# EAGLE board DCDC_24Vto12V (EAGLE 9.6.2)
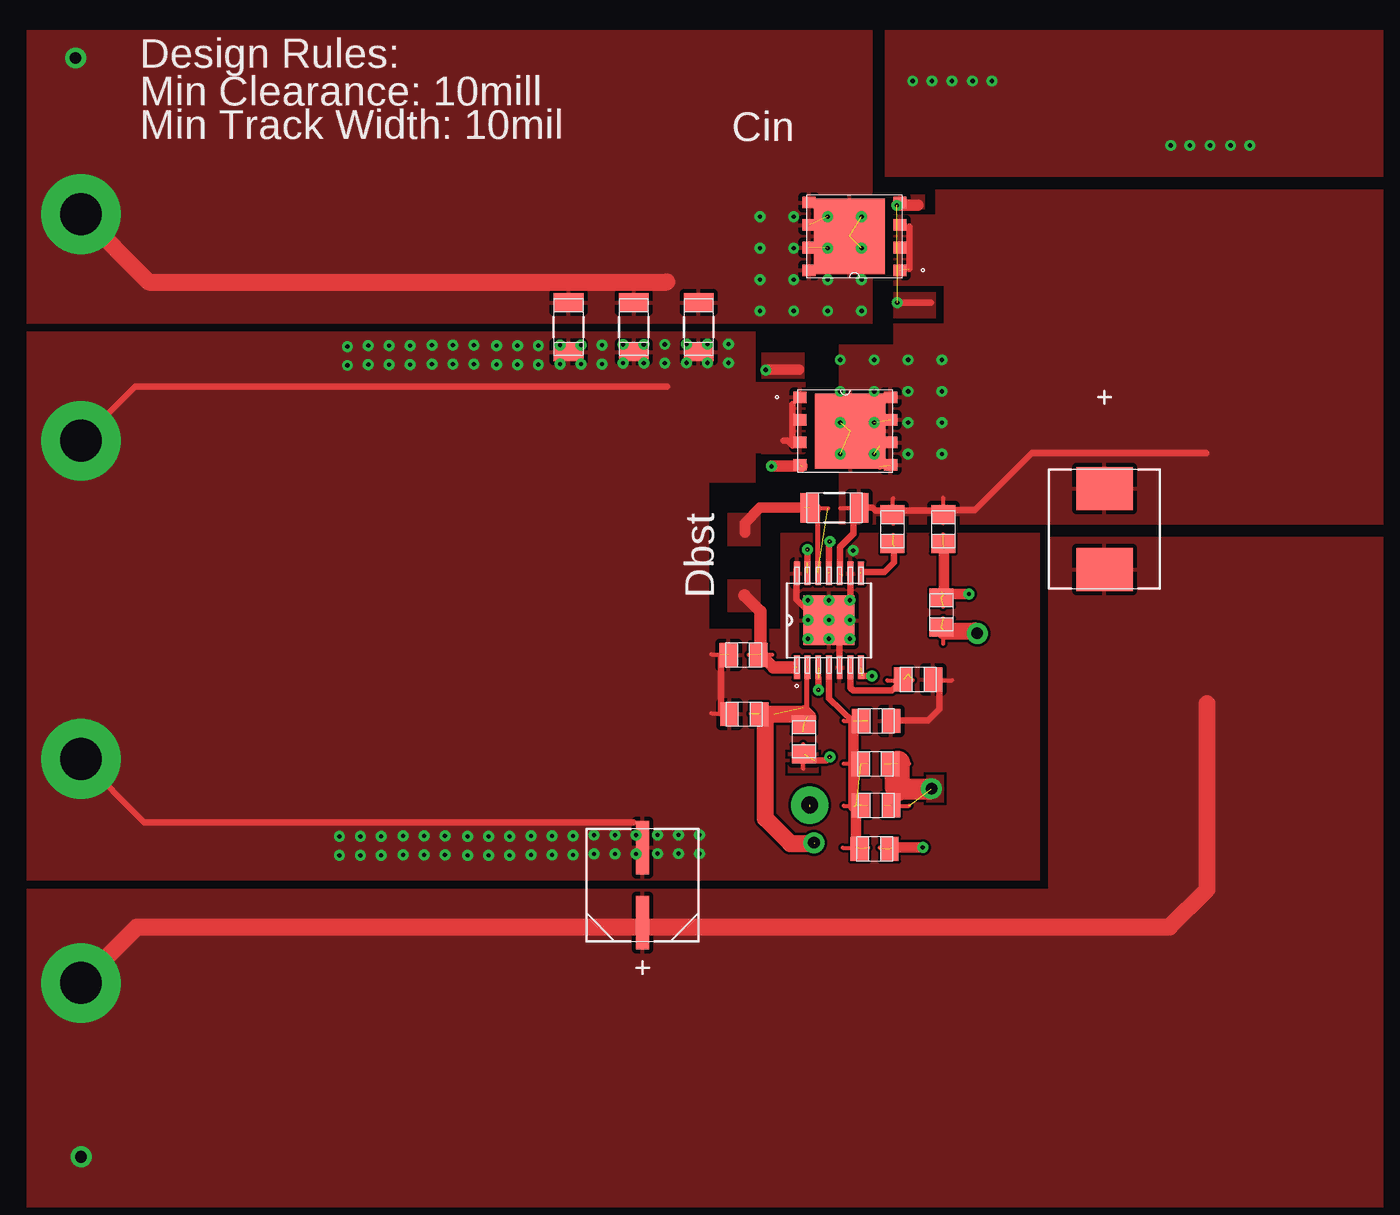
[diagram p0: board, top side]
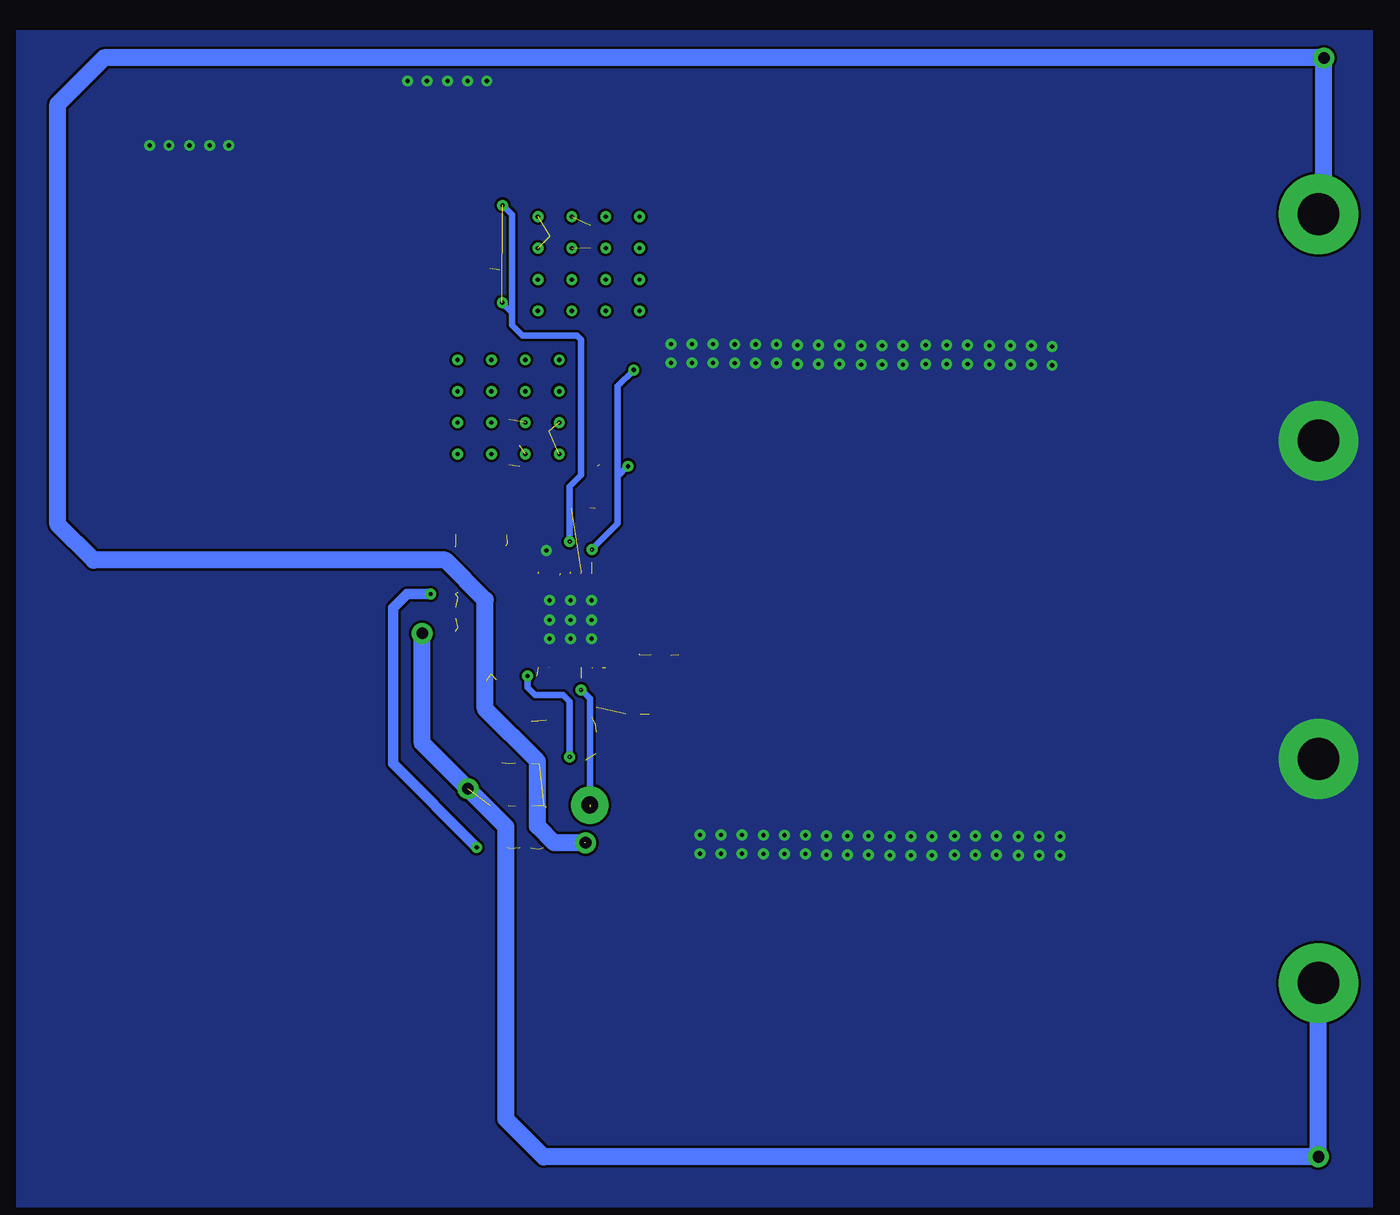
[diagram p1: board, bottom side, seen from below]

No outline drawn. Coordinates in mm, seen from the top.
Copper layers ((1*2)+(15*16)): TOP 0.035mm / dielectric 0.15mm / INTERNAL1 0.035mm / dielectric 0.15mm / layer 15 0.035mm / dielectric 0.2mm / BOTTOM 0.035mm
Design rules "custom": minimum track width 6mil, minimum drill 0.35mm, track to track 6mil, track to pad 6mil, pad to pad 6mil, via to via 6mil, smd to smd 6mil, copper to edge 40mil, drill to drill 6mil, minimum pad ring 10mil, minimum via ring 8mil, stop-mask expansion 4mil, vias tented up to drill 0mil, thermal gap 10mil

## Footprints (pad centres in the part's own frame; a part is rotated, then mirrored left to right if it is on the bottom)
0805 = smd 1.118 x 1.448: 1 -0.902,0; 2 0.902,0
1206 = smd 1.118 x 1.803: 1 -1.499,0; 2 1.499,0
SM_RADIAL_6.3AMM = smd 3.251 x 0.787: 1 -2.273,0; 2 2.273,0
TP-1502 = drill 0.813 pad 1.651: 1 0,0
IHLP-2525CZ = smd 2.616 x 3.429: 1 -2.464,0; 2 2.464,0
TRANS_NEXFET_Q5A = smd 0.8 x 0.7: 1 -2.752,2.055; 2 -2.752,0.685; 3 -2.752,-0.685; 4 -2.752,-2.055; 5 2.752,-2.055; 6 2.752,-0.685; 7 2.752,0.685; 8 2.752,2.055 | smd 4.3 x 4.56: 9 0.3,0
MXA14A = smd 1.422 x 0.356: 1 -2.845,1.95; 2 -2.845,1.3; 3 -2.845,0.65; 4 -2.845,0; 5 -2.845,-0.65; 6 -2.845,-1.3; 7 -2.845,-1.95; 8 2.845,-1.95; 9 2.845,-1.3; 10 2.845,-0.65; 11 2.845,0; 12 2.845,0.65; 13 2.845,1.3; 14 2.845,1.95 | smd 2.997 x 3.099: 15 0,0

## Placement (x,y rotation side)
CAC  [0805]  77.06,47.24 0 top
CBST  [1206]  74.63,67.94 0 top
CBYP  [0805]  69.16,55.42 180 top
CFF  [0805]  77.17,49.89 180 top
CIN_1  [1206]  66.4,78.89 270 top
CIN_2  [1206]  62.46,78.89 270 top
CIN_3  [1206]  58.5,78.89 270 top
COUT  [SM_RADIAL_6.3AMM]  62.99,45.06 90 top
CR  [0805]  81.13,61.59 270 top
CSS  [0805]  79.71,57.53 0 top
CVCC  [0805]  69.11,59 180 top
EN  [TP-1502]  73.1,49.89 0 top
GND  [TP-1502]  28.91,71.98 0 top
GND1  [TP-1502]  28.91,52.65 90 top
L1  [IHLP-2525CZ]  91.01,66.65 270 top
M1  [TRANS_NEXFET_Q5A]  75.84,84.4 180 top
M2  [TRANS_NEXFET_Q5A]  75.29,72.59 0 top
RFB1  [0805]  77.17,55.02 0 top
RFB2  [0805]  77.11,52.4 180 top
RLIM  [0805]  78.16,66.65 270 top
RON  [0805]  72.77,53.9 270 top
RR  [0805]  81.23,66.65 90 top
U1  [MXA14A]  74.3,61.11 90 top
VIN  [TP-1502]  28.91,85.72 0 top
VOUT  [TP-1502]  28.91,39.07 0 top

## Library data of the parts
CAC = ultra-librarian; REFDES: Cac; TYPE: C0805C223K5RACTU
CBST = ultra-librarian; REFDES: Cbst; TYPE: ECPU1C474MA5
CBYP = ultra-librarian; REFDES: Cbyp; TYPE: C0805C104M5RACTU
CFF = ultra-librarian; REFDES: Cff; TYPE: GRM2165C2A131JA01D
CIN_1-CIN_3 = ultra-librarian
COUT = ultra-librarian; REFDES: Cout; TYPE: EEHZC1E560P
CR = ultra-librarian; REFDES: Cr; TYPE: C0805C223K5RACTU
CSS = ultra-librarian; REFDES: Css; TYPE: C2012C0G1H153J085AA
CVCC = ultra-librarian; REFDES: Cvcc; TYPE: GRM21BR71A225KA01L
EN = ultra-librarian; REFDES: EN; TYPE: TP-1502
GND = ultra-librarian; REFDES: GND; TYPE: TP-1502
GND1 = ultra-librarian; REFDES: GND1; TYPE: TP-1502
L1 = ultra-librarian; REFDES: L1; TYPE: IHLP2525CZER8R2M01
M1 = ultra-librarian; REFDES: M1; TYPE: CSD18504Q5A
M2 = ultra-librarian; REFDES: M2; TYPE: CSD18537NQ5A
RFB1 = ultra-librarian; REFDES: Rfb1; TYPE: ERJ-6ENF1002V
RFB2 = ultra-librarian; REFDES: Rfb2; TYPE: ERJ-6ENF1913V
RLIM = ultra-librarian; REFDES: Rlim; TYPE: C0805C223K5RACTU
RON = ultra-librarian; REFDES: Ron; TYPE: CRCW0805205KFKEA
RR = ultra-librarian; REFDES: Rr; TYPE: C0805C223K5RACTU
U1 = ultra-librarian; REFDES: U1; TYPE: LM3150MH/NOPB
VIN = ultra-librarian; REFDES: VIN; TYPE: TP-1502
VOUT = ultra-librarian; REFDES: VOUT; TYPE: TP-1502

## Nets
0: CBYP.2 CIN_1.2 CIN_2.2 CIN_3.2 COUT.2 CSS.2 CVCC.2 GND1.1 GND.1 M2.1 M2.2 M2.3 RFB1.2 U1.5 U1.9 U1.14 U1.15
1: CBYP.1 CIN_1.1 CIN_2.1 CIN_3.1 M1.5 M1.6 M1.7 M1.8 M1.9 RON.1 U1.2 VIN.1
2: RON.2 U1.7
3: CAC.1 CFF.2 RFB1.1 RFB2.2 U1.4
4: CBST.2 L1.1 M1.1 M1.2 M1.3 M2.5 M2.6 M2.7 M2.8 M2.9 RLIM.1 RR.2 U1.10
5: CFF.1 COUT.1 CR.2 L1.2 RFB2.1 VOUT.1
7: M2.4 U1.13
8: CBST.1 U1.12
9: M1.4 U1.11
10: RLIM.2 U1.8
11: CSS.1 U1.6
12: CVCC.1 U1.1
19: EN.1 U1.3
26: CAC.2 CR.1 RR.1

## Tracks (layer width: path | path; a pad name or v marks a point on that pad's centre or on a via)
0  (via drill 0.25 pad 0.51, 2.54 pad 4.83)  (1 unrouted)
  TOP 0.254: 67.16,59.05 68.3,59.05 | 77.67,55.02 79.15,55.02 | 80.21,57.48 81.76,57.48 | 67.16,55.47 68.3,55.47
  TOP 0.381: 81,57.51 81,55.75 80.29,55.04 78.41,55.04 | v28.93,52.7 32.77,48.87 62.43,48.87 | v28.93,72.01 32.21,75.29 64.47,75.29 | 71.53,72.01 71.78,72.01 72.08,71.7 72.08,72.97 72.08,74.24 | 67.74,55.47 67.74,59.05 | 75.59,64.34 75.59,61.75 74.93,61.11 74.93,59.74 | 74.93,58.27 74.93,59.74 | 74.93,59.74 72.31,62.38 72.31,64.21
  other vias: 95.02,89.92 96.19,89.92 97.41,89.92 99.82,89.92 98.65,89.92 83.01,93.83 84.18,93.83 81.76,93.83 80.54,93.83 79.38,93.83 66.45,46.96 65.18,46.96 63.91,46.96 60.05,46.94 61.32,46.94 62.59,46.94 62.59,48.08 61.32,48.08 60.05,48.08 63.91,48.11 65.18,48.11 66.45,48.11 58.78,46.89 57.51,46.89 56.24,46.89 52.37,46.86 53.64,46.86 54.91,46.86 54.91,48.01 53.64,48.01 52.37,48.01 56.24,48.03 57.51,48.03 58.78,48.03 51,46.89 49.73,46.89 48.46,46.89 44.6,46.86 45.87,46.86 47.14,46.86 47.14,48.01 45.87,48.01 44.6,48.01 48.46,48.03 49.73,48.03 51,48.03 45.09,77.72 45.09,76.58 52.76,77.8 51.49,77.8 50.22,77.8 46.35,77.77 47.62,77.77 48.9,77.77 48.9,76.63 47.62,76.63 46.35,76.63 50.22,76.66 51.49,76.66 52.76,76.66 60.53,77.8 59.26,77.8 57.99,77.8 54.13,77.77 55.4,77.77 56.67,77.77 56.67,76.63 55.4,76.63 54.13,76.63 57.99,76.66 59.26,76.66 60.53,76.66 68.2,77.88 66.93,77.88 65.66,77.88 61.8,77.85 63.07,77.85 64.34,77.85 64.34,76.71 63.07,76.71 61.8,76.71 65.66,76.73 66.93,76.73 68.2,76.73 75.56,61.14 74.3,61.14 73.03,61.14 73.03,59.99 74.3,59.99 75.56,59.99 75.56,62.33 74.3,62.33 73.03,62.33 75.77,65.35
  pour TOP (rank 6): 70.21,71.2 70.21,72.77 72.8,72.77 72.8,71.2
  pour TOP (rank 6): 77.7,96.9 77.7,88.01 107.92,88.01 107.92,96.9
  pour TOP (rank 6): 25.63,78.61 69.82,78.61 69.82,75.56 72.87,75.56 72.87,71.25 69.82,71.25 69.82,69.47 67.03,69.47 67.03,60.58 71.35,60.58 71.35,66.42 87.1,66.42 87.1,45.34 25.63,45.34
  pour BOTTOM: 25.63,25.53 25.63,96.9 107.92,96.9 107.92,25.53
1  (via drill 0.25 pad 0.51, 0.71 pad 1.27, 2.54 pad 4.83)  (10 unrouted)
  TOP 0.254: 72.72,54.36 72.72,55.83 | 69.55,55.45 70.97,55.45
  TOP 0.305: 72.97,58.27 72.97,55.63 72.8,55.45
  TOP 1.016: v28.93,85.75 33.05,81.64 64.47,81.64 | v73.38,47.62 73.33,47.57 71.96,47.57 70.43,49.1 70.43,55.37 70.33,55.37 70.26,55.45 72.8,55.45 73,55.24
  BOTTOM 1.016: 28.93,85.72 28.6,86.06 v28.6,95.22 102.59,95.22 105.39,92.43 105.39,66.93 103.23,64.77 81.89,64.77 79.48,62.36 79.48,55.75 76.3,52.58 76.3,48.64 75.29,47.62 73.46,47.62
  other vias: 70.1,85.6 72.16,85.6 74.22,85.6 76.28,85.6 76.28,83.69 74.22,83.69 72.16,83.69 70.1,83.69 76.28,81.79 74.22,81.79 72.16,81.79 70.1,81.79 76.28,79.88 74.22,79.88 72.16,79.88 70.1,79.88
  pour TOP (rank 3): 73.81,82.4 73.81,86.28 77.62,86.28 77.62,82.4
  pour TOP (rank 4): 25.63,96.9 76.94,96.9 76.94,79.12 25.63,79.12
  pour BOTTOM (rank 5): 55.85,94.11 76.94,94.11 76.94,78.87 55.85,78.87
2  (via drill 0.25 pad 0.51)  (3 unrouted)
  TOP 0.254: 72.72,52.12 72.72,53.59
  TOP 0.381: 76.33,57.73 v76.91,57.73 | 74.32,52.81 74.12,52.6 73.43,52.6
  BOTTOM 0.381: v76.91,57.73 76.91,57.05 76.45,56.59 74.75,56.59 74.35,56.19 v74.35,52.83
  pour TOP: 71.81,51.87 71.81,53.34 73.66,53.34 73.66,51.87
3  (9 unrouted)
  TOP 0.254: 75.18,55.02 76.66,55.02 | 75.18,49.86 76.66,49.86 | 75.18,52.43 76.66,52.43 | 75.13,47.32 76.68,47.32
  TOP 0.381: U1.4 74.3,58.24 74.3,56.39 75.77,54.94
  TOP 0.635: 75.92,47.35 75.92,49.89 | 75.79,49.78 75.77,49.81 75.77,54.94 75.77,55.04
4  (via drill 0.25 pad 0.51)  (7 unrouted)
  TOP 0.254: 74.98,67.92 76.53,67.92 | 78.18,66.98 78.18,68.53 | 81.23,67 81.23,68.56
  TOP 0.381: 77.39,70.43 77.39,71.7 | 79.17,84.99 79.17,83.72 79.17,82.45 | 97.18,71.25 86.59,71.25 83.13,67.79 81.25,67.79 81.23,67.77 78.21,67.77 77.11,67.77 76.94,67.94 75.77,67.94 75.77,66.42 | 75.77,66.42 75.77,66.34 74.95,65.53 74.95,63.86 | 74.98,65.63 75.77,66.42
  other vias: 74.98,71.2 77.04,71.2 79.1,71.2 81.15,71.2 74.98,73.1 77.04,73.1 79.1,73.1 81.15,73.1 74.98,75.01 77.04,75.01 79.1,75.01 81.15,75.01 81.15,76.91 79.1,76.91 77.04,76.91 74.98,76.91
  pour TOP (rank 3): 73.66,70.38 73.66,74.27 77.47,74.27 77.47,70.38
  pour TOP (rank 4): 74.9,66.93 74.9,77.85 78.21,77.85 78.21,79.12 81.25,79.12 81.25,81.41 78.21,81.41 78.21,85.72 80.75,85.72 80.75,87.25 107.92,87.25 107.92,66.93
  pour BOTTOM (rank 5): 78.59,87.76 88.49,87.76 88.49,81.41 92.3,77.6 92.3,66.8 74.9,66.8 74.9,69.85 74.02,70.74 74.02,77.98 78.59,77.98 78.59,86.11
5  (via drill 0.71 pad 1.27, 2.54 pad 4.83)  (6 unrouted)
  TOP 0.254: 77.67,49.86 79.15,49.86 | 77.67,52.43 79.15,52.43 | 81.23,59.69 81.23,61.24
  TOP 1.016: 97.23,56.06 97.23,44.81 94.94,42.52 62.43,42.52 32.33,42.52 v28.93,39.12 | v83.29,60.33 83.13,60.48 81.25,60.48
  TOP 1.27: 78.46,50.9 v80.52,50.9
  TOP 1.524: 78.46,50.9 78.46,52.45
  BOTTOM 1.016: v28.93,39.12 v28.93,28.57 75.92,28.57 78.21,30.86 78.21,48.59 v80.52,50.9 83.29,53.67 v83.29,60.33
  pour TOP (rank 4): 25.63,25.53 25.63,44.83 87.6,44.83 87.6,66.17 107.92,66.17 107.92,25.53
  pour TOP (rank 5): 80.21,51.74 80.21,50.06 81.25,50.06 81.25,51.74
7  (via drill 0.25 pad 0.51)  (3 unrouted)
  TOP 0.381: 73,64.62 v73,65.41
  TOP 0.635: 70.48,76.33 72.49,76.33
  TOP 0.711: v70.81,70.46 72.67,70.46
  BOTTOM 0.381: 71.45,69.85 71.45,75.31 v70.46,76.3 | 71.45,69.85 71.45,66.98 73,65.43 73,65.38 | 71.45,69.85 70.84,70.46 v70.81,70.46
  pour TOP (rank 2): 70.21,75.77 70.21,77.34 72.8,77.34 72.8,75.77
  pour TOP (rank 3): 71.35,70.13 71.35,70.71 72.85,70.71 72.85,70.13
8  (3 unrouted)
  TOP 0.254: 72.82,67.92 74.24,67.92
  TOP 0.305: 73.64,64.06 73.64,67.77 73.48,67.94
  TOP 0.635: 73.48,67.94 70.1,67.94 69.19,67.03 69.19,66.45
  pour TOP: 68.15,65.63 68.15,67.61 70.13,67.61 70.13,65.63
9  (via drill 0.25 pad 0.51)  (3 unrouted)
  TOP 0.381: v78.44,80.39 80.49,80.39 | 74.3,64.06 74.3,65.86 74.32,65.89
  TOP 0.711: v78.41,86.28 79.7,86.28
  BOTTOM 0.381: 77.88,79.81 78.44,80.37 v78.44,80.39 | v78.41,86.28 77.85,85.72 77.85,79.02 77.22,78.38 73.89,78.38 73.66,78.16 73.66,69.93 74.35,69.24 v74.35,65.89
  pour TOP (rank 2): 78.21,79.45 78.21,81.03 80.8,81.03 80.8,79.45
  pour TOP (rank 2): 78.21,86.06 78.21,86.94 80.11,86.94 80.11,86.06
10  (3 unrouted)
  TOP 0.254: 78.18,64.75 78.18,66.29
  TOP 0.381: 76.22,64.06 77.67,64.06 78.23,64.62 78.23,65.63
11  (3 unrouted)
  TOP 0.254: 77.83,57.48 79.38,57.48
  TOP 0.381: U1.6 75.59,57.02 75.79,56.84 78.11,56.84 79.12,57.86
12  (4 unrouted)
  TOP 0.254: 69.42,59.03 70.84,59.03
  TOP 0.762: 69.16,62.61 70.13,61.65 70.13,59.08 | 70.13,59.03 70.92,58.24 72.19,58.24
  pour TOP: 68.15,61.62 68.15,63.6 70.13,63.6 70.13,61.62
19  (via drill 0.25 pad 0.51, 1.02 pad 2.29)  (5 unrouted)
  TOP 0.381: 73.66,56.92 73.66,57.63
  BOTTOM 0.381: 73.66,56.92 73.1,56.36 73.1,49.78
  other vias: 73.66,56.9 73.13,49.91
26  (via drill 0.25 pad 0.51)  (7 unrouted)
  TOP 0.254: 81.23,64.77 81.23,66.32 | 81.23,61.92 81.23,63.48 | 77.37,47.32 78.92,47.32
  TOP 0.635: 78.16,47.35 v79.98,47.35 | 81.13,62.84 81.25,62.97 81.25,65.56 | 81.25,62.71 v82.78,62.71
  BOTTOM 0.635: v79.98,47.35 85.06,52.43 85.06,61.85 84.2,62.71 v82.78,62.71

## Text on the board
ASSYNOTES: Design Rules: | Min Clearance: 10mill | Min Track Width: 10mil | Cin | Dbst